# Altium PCB PCB1.PcbDoc (part 2 of 2)
Units mm, origin at the board's own origin, x right, y up, seen from the top; angles counter-clockwise.
Board outline 100.46 x 63.37 mm, 4 copper layers (Top Layer, GND, VCC, Btm lyer), stack 0.603 mm thick; 189 components, 141 nets, 719 pads, 18 vias.
Unrouted connection lines stored in the file: 486.
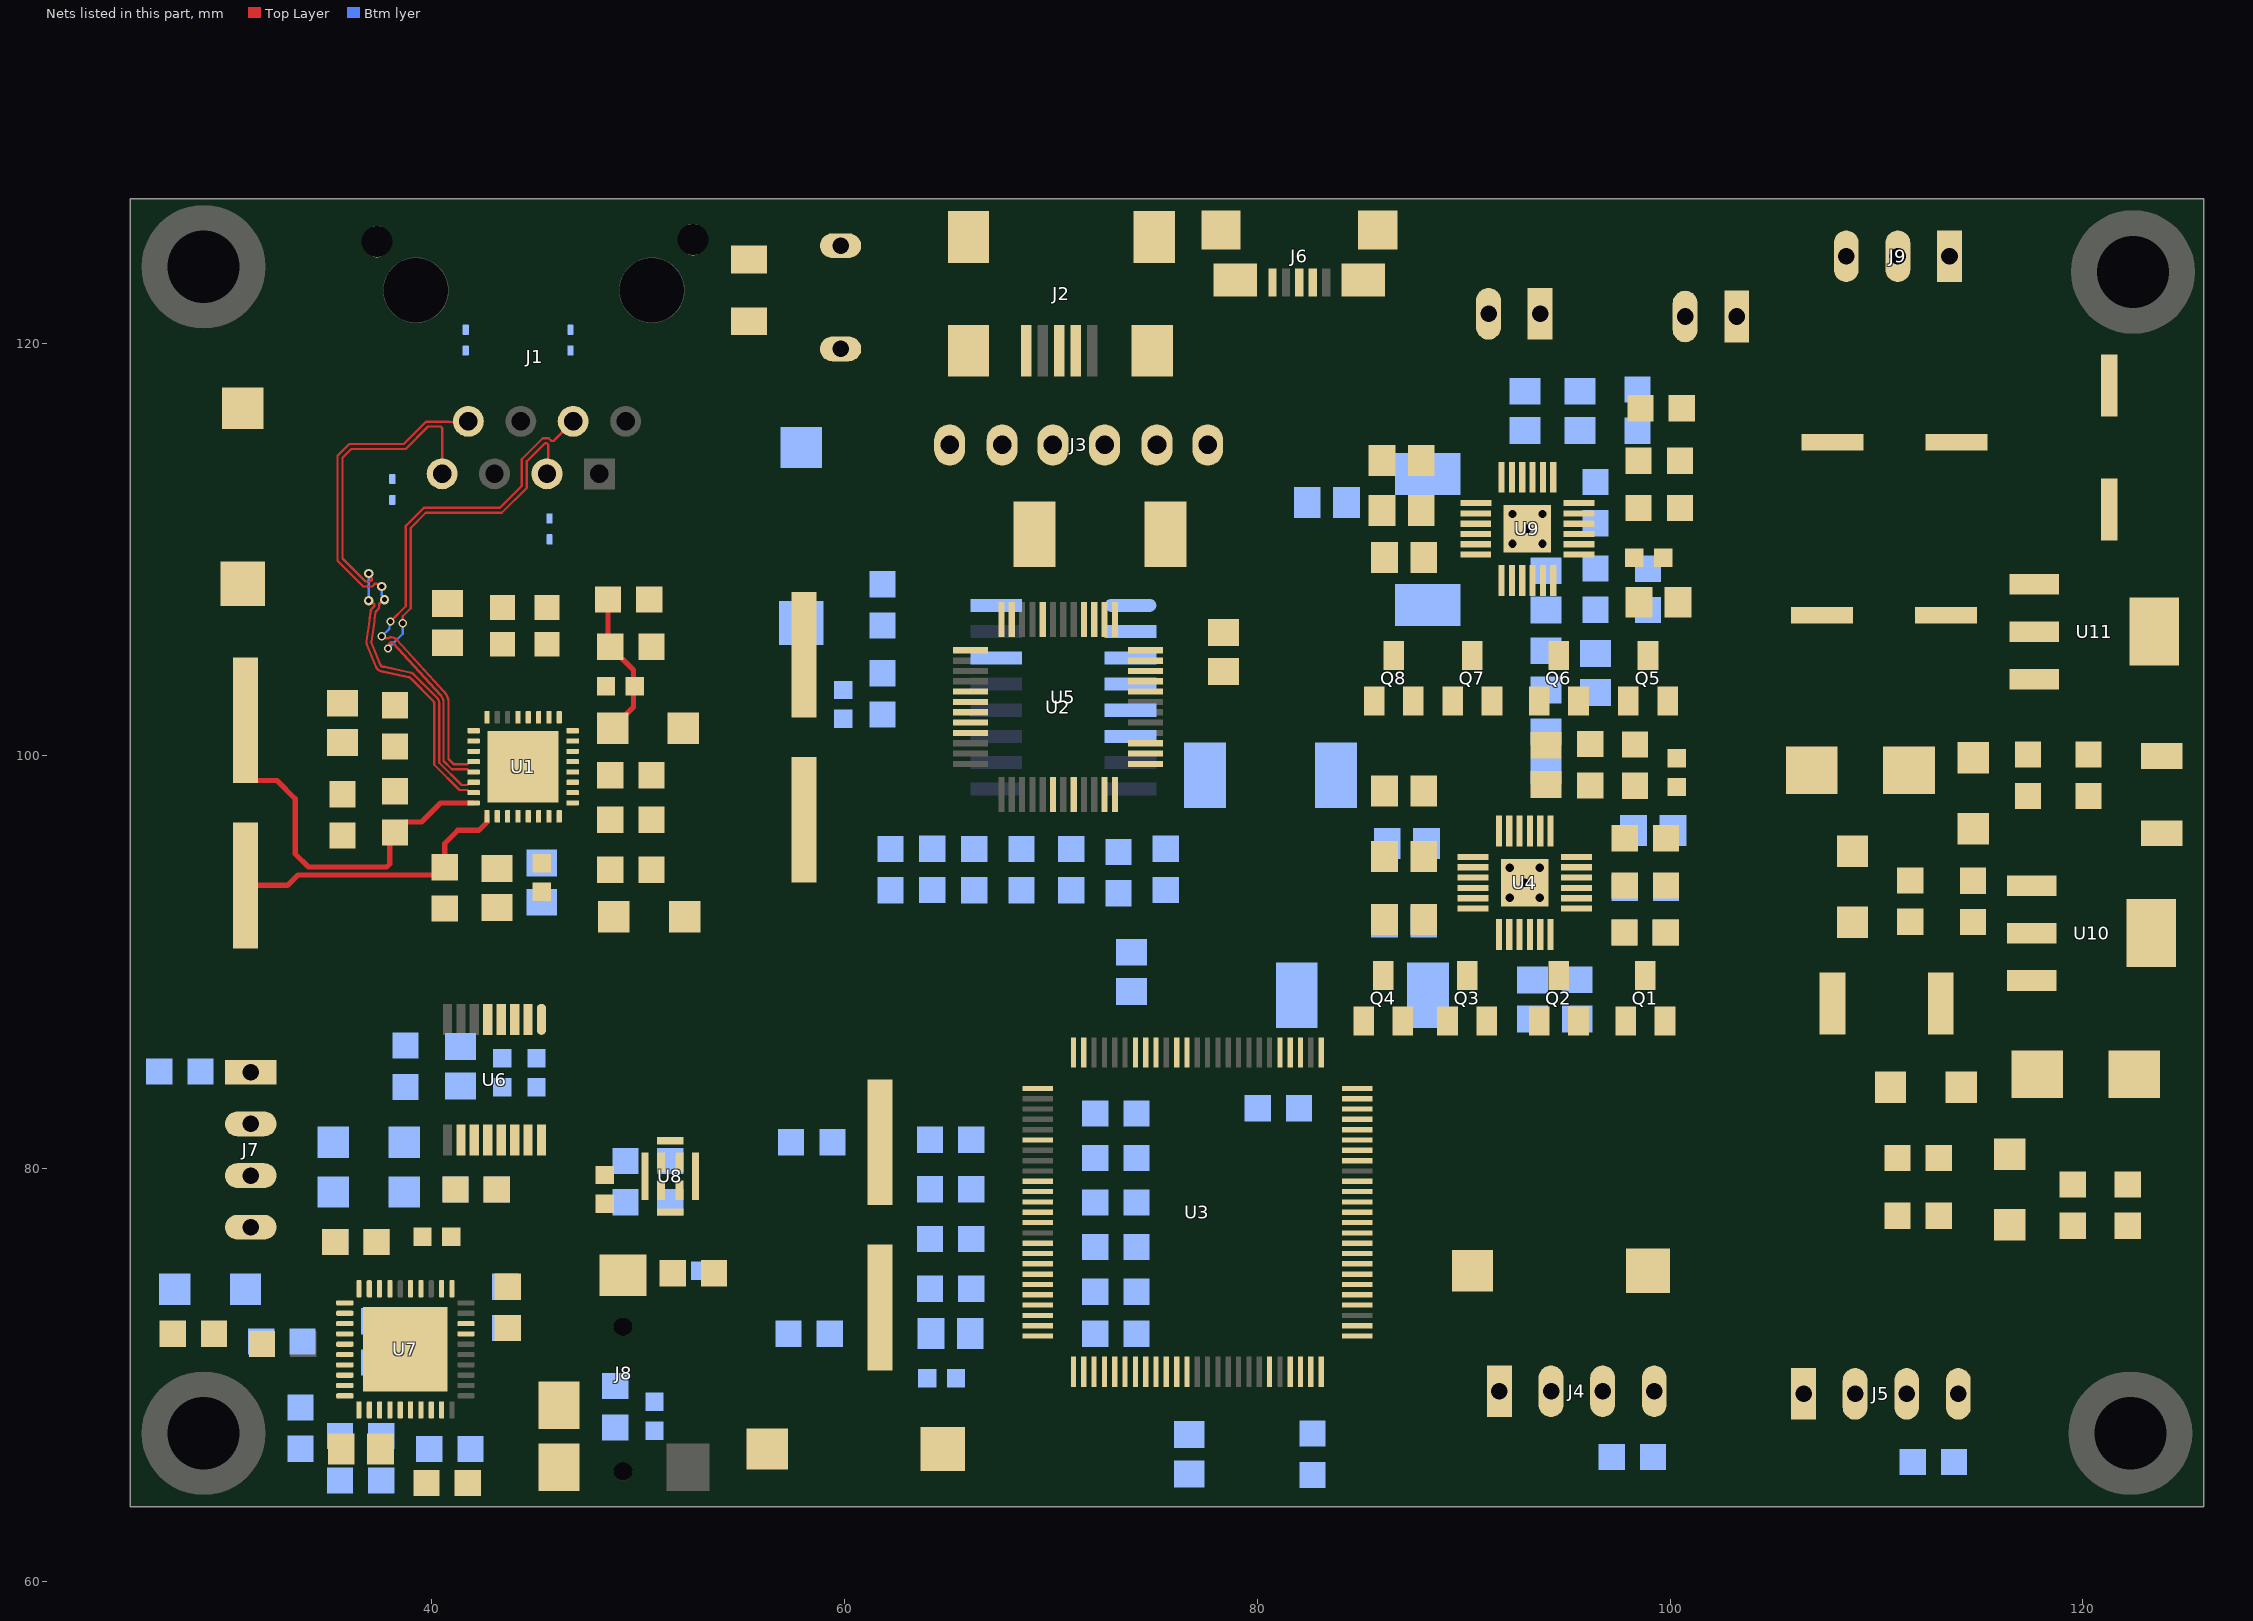
[diagram p2: the nets of this part, all layers, seen from the top]

## Part data (continued)
C13 C14 C15 C37 C39 C70 C72: library part CAP_0.1uF-50V-20%-0805, "0.1µF ±20% 50V Ceramic Capacitor X7R 0805 (2012 Metric)", Alternate Part Number-1=NA, Case/Package=0805, Manufacturer="Samsung Electro-Mechanics", Manufacturer Part Number=CL21B104MBCNNNC, Supplier Part Number-1=0805B104K500CT, Supplier-1=SIRICOM
C16 C17: library part CAP_30pF-50V-10%-0805, "±10% 50V Ceramic Capacitor C0G, NP0 0805 (2012 Metric)", Alternate Part Number=NA, Case/Package=0805, Manufacturer=KEMET, Manufacturer Part Number=C0805C300K5GAC7800, Supplier Part Number-1="399-17443-1-ND - Cut Tape (CT)", Supplier-1=Digikey
C23 C24: library part CAP_18pF-50V-5%-0805, "18pF ±5% 50V Ceramic Capacitor C0G, NP0 0805 (2012 Metric)", Alternate Part Number-1=NA, Case/Package=0805, Manufacturer=Yageo, Manufacturer Part Number=CL21C180JBANNNC, Supplier Part Number-1=NA, Supplier-1=NA
C29: library part CAP_4.7uF-50V-10%-0805, "4.7µF ±10% 50V Ceramic Capacitor X5R 0805 (2012 Metric)", Alternate Part Number-1=NA, Case/Package=0805, Manufacturer=Yageo, Manufacturer Part Number=GRM21BR61H475KE51L, Supplier Part Number-1=CL21A475KBQNNNE, Supplier-1=SIRICOM
C30 C31: library part CAP_2.2uF-25V-10%-0805, "2.2µF ±10% 25V Ceramic Capacitor X7R 0805 (2012 Metric)", Alternate Part Number-1=NA, Case/Package=0805, Manufacturer=KEMET, Manufacturer Part Number=CL21B225KAFNFNE, Supplier Part Number-1=CL21A225KAFNNNE, Supplier-1=SIRICOM
C40 C73: library part CAP_100pF-100V-5%-0805, "100pF ±5% 100V Ceramic Capacitor C0G, NP0 0805 (2012 Metric)", Alternate Part Number-1=NA, Case/Package=0805, Manufacturer=Murata, Manufacturer Part Number=CL21C101JC61PNC, Supplier Part Number-1=0805N101J101CT, Supplier-1=SIRICOM
C45 C46 C47 C52 C55 C56 C58 C60 C61 C65 C81 C84 C87 C90: library part CAP_0.1uF-50V-10%-0805, "0.1µF ±10% 50V Ceramic Capacitor X7R 0805 (2012 Metric)", Alternate Part Number-1=NA, Case/Package=0805, Manufacturer=Samsung, Manufacturer Part Number=CL21B104KBCNNNC, Supplier Part Number-1=0805B104K500CT, Supplier-1=SIRICOM
C62 C63: library part CAP_22nF-50V-10%-0805, "0.022µF ±10% 50V Ceramic Capacitor X7R 0805 (2012 Metric)", Alternate Part Number-1=NA, Case/Package=0805, Manufacturer="Samsung Electro-Mechanics", Manufacturer Part Number=CL21B223KBANNNC, Supplier Part Number-1="1276-1081-1-ND - Cut Tape (CT)", Supplier-1=Digikey
C66 C67 C68 C69: library part CAP_150pF-50V-10%-0805, "150pF ±10% 50V Ceramic Capacitor C0G, NP0 0805 (2012 Metric)", Alternate Part Number-1=NA, Case/Package=0805, Manufacturer="AVX Corporation", Manufacturer Part Number=08055A151KAT2A, Supplier Part Number-1="478-10501-1-ND - Cut Tape (CT)", Supplier-1=Digikey
C77 C78 C79: library part CAP-P_100uF-25V-20%-RAD, "100µF 25V Aluminum Electrolytic Capacitors Radial, Can - SMD 1000 Hrs @ 105°C", Alternate Part Number-1=NA, Case/Package=Radial-SMD, Manufacturer=Nichicon, Manufacturer Part Number=UWT1E101MCL1GS, Supplier Part Number-1=UWT1E101MCL1GS, Supplier-1="SP ROAD"
D1 D2 D3 D4: library part DIO-T_3.3V-8.8V-10A-SOD923, "TVS DIODE 3.3V 8.8V SOD923", Alternate Part Number-1=NA, Case/Package=SOD923, Manufacturer="Micro Commercial Co", Supplier Part Number-1=ESD3V3D9-TPMSTR-ND, Manufacturer Part Number=ESD3V3D9-TP, Supplier-1=Digikey
D5 D7: library part DIO-S_445mV-30V-2A-SMB, "Diode Schottky 30V 2A Surface Mount SMB", Alternate Part Number-1=NA, Case/Package=SMB, Manufacturer="ON Semiconductor", Manufacturer Part Number=MBRS130LT3G, Supplier Part Number-1=MBRS130LT3G, Supplier-1=ARROW
D6: library part DIO-Z_1.8V-500mW-DO213AA, "Zener Diode 1.8V 500mW ±5% Surface Mount DO-213AA"
D8: library part DIO-Z_3.3V-500mW-SOD-80, "Zener Diode 3.3V 500mW ±5% Surface Mount LLDS; MiniMelf", Alternate Part Number-1=TZM5226B-GS08, Case/Package=SOD-80, Manufacturer="Vishay Semiconductors", Manufacturer Part Number=BZV55-C3V3,135, Supplier Part Number-1=BZV55-C3V3, Supplier-1=SIRICOM
DS1 DS2: library part LED_GREEN-2.2-20mA-0805, "Green 569nm LED Indication - Discrete 2.1V 0805 (2012 Metric)", Alternate Part Number-1=NA, Case/Package=0805, Manufacturer="Vishay Lite-On", Manufacturer Part Number=LTST-C171GKT, Supplier Part Number-1=LTST-C171GKT, Supplier-1="SP ROAD"
FB1 FB2 FB3 FB4: library part FB_1K-100MHZ-1.6A-0805, "1 kOhms @ 100MHz 1 Power Line Ferrite Bead 0805 (2012 Metric) 1.6A", Alternate Part Number-1=NA, Case/Package=0805, Manufacturer=Laird, Manufacturer Part Number=BLM21SP102SH1D, Supplier Part Number-1=ACMS201209A102, Supplier-1=SIRICOM
J1: library part CON-SKT-RJ_8C8P-RA-TH, "8 Pins, 2 Row 2.54mm Pitch, right angle Connector, male", Alternate Part Number-1=NA, Case/Package=TH-CON, Manufacturer=Assmann, Manufacturer Part Number=A-2004-2-4-LPS-N-R, Supplier Part Number-1=A-2004-2-4-LPS-N-R, Supplier-1="SP ROAD"
J2: library part CON_USB2.0-MINIB-SMD, "USB - mini B USB 2.0 Receptacle Connector 5 Position Surface Mount, Right Angle", Alternate Part Number-1=NA, Case/Package=USB-MINI-B, Manufacturer=EDAC, Manufacturer Part Number=690-005-299-043, Supplier Part Number-1=C105424, Supplier-1=LCSC
J3: library part CON-BS-SKT_6X1-100-ST-TH, "6 Pins, 1 Row 2.54mm Pitch, Straight bergstrip, Female", Alternate Part Number-1=NA, Case/Package=TH-CON, Manufacturer=Molex, Manufacturer Part Number=22-10-2061, Supplier Part Number-1=NA, Supplier-1="SP ROAD"
J4 J5 J7: library part CON-PLG_4X1-100-RA-TH, "4 Pins, 1 Row 2.54mm Pitch, right angle Connector, male", Alternate Part Number-1=NA, Case/Package=TH-CON, Crimp Part Number=ASXHSXH22K51, Manufacturer="Wurth Electronics", Mating Part Number=XHP-4, Supplier Part Number-1=S4B-XH-A, Manufacturer Part Number=S4B-XH-A-1(LF)(SN), Supplier-1=LCSC
J6: library part CON_USB2.0_MICROB-SMD, "USB - micro B USB 2.0 Receptacle Connector 5 Position Surface Mount, Right Angle", Alternate Part Number-1=NA, Case/Package="USB MICRO-B SMD", Manufacturer=ICC, Manufacturer Part Number=10118192-0001LF, Supplier Part Number-1="MICRO USB", Supplier-1=SUNROM
J8: library part CON-PLG-STEREO_4X1-100-RA-SMD, "2.50mm (0.094\", 3/32\", Sub Mini, Miniature) - Headphone Phone Jack Stereo (4 Conductor, TRRS) Connector Solder", Alternate Part Number-1=NA, Case/Package=SMD, Manufacturer="CUI Devices", Manufacturer Part Number=SJ-2504A-SMT-TR, Supplier Part Number-1="CP-SJ-2504A-SMT-CT-ND - Cut Tape (CT)", Supplier-1=Digikey
J9: library part CON-TB_3X1-100-ST-TH, "3 Pins, 1 Row 2.54mm Pitch, straight Connector, male", Alternate Part Number-1=NA, Case/Package=TH-CON, Manufacturer="Phoenix Contact", Manufacturer Part Number=1725669, Supplier Part Number-1=1725669, Supplier-1="SP ROAD"
MH1 MH2 MH3 MH4: library part MH_3.5H_6D, Alternate Part Number-1=NA, Case/Package=TH, Manufacturer=NA, Manufacturer Part Number=NA, Supplier Part Number-1=NA, Supplier-1=NA
MOTOR1 MOTOR2: library part CON-PLG_2X1-100-RA-TH, "2 Pins, 1 Row 2.54mm Pitch, right angle Connector, male", Alternate Part Number-1=NA, Case/Package=TH-CON, Crimp Part Number=ASXHSXH22K51, Manufacturer=JST, Mating Part Number=XHP-2, Manufacturer Part Number=S2B-XH-A(LF)(SN), Supplier Part Number-1=S2B-XH-A(LF)(SN), Supplier-1=ARROW
Q1 Q2 Q3 Q4 Q5 Q6 Q7 Q8: library part MOSFET-N_30V-5.8A-SOT23, "N-Channel 30V 5.8A (Ta) 1.4W (Ta) Surface Mount SOT-23-3L", Alternate Part Number-1=PMV50ENEAR, Case/Package=SOT23, Manufacturer="International Rectifier", Manufacturer Part Number=AO3404A, Supplier Part Number-1=AO3404A, Supplier-1=ARROW
R1 R3 R16 R17 R18 R19 R22 R23 R24 R25 R36 R37 R38 R39 R42 R43 R44 R45: library part RES_10K-0.125W-1%-0805, "10 kOhms ±1% 0.125W, 1/8W Chip Resistor 0805 (2012 Metric) Automotive AEC-Q200 Thick Film", Alternate Part Number-1=WR08X1002FTL, Case/Package=0805, Manufacturer=CTS, Manufacturer Part Number=WR08X1002FTL, Supplier Part Number-1=WR08X1002FTL, Supplier-1=SIRICOM
R2 R4 R9 R12 R26 R27 R28 R33: library part RES_10K-0.1W-1%-0603, "10 kOhms ±1% 0.1W, 1/10W Chip Resistor 0603 (1608 Metric) Automotive AEC-Q200 Thick Film", Alternate Part Number-1=0603WAJ0103T5E, Case/Package=0603, Manufacturer=Walsin, Manufacturer Part Number=WR06X1002FTL, Supplier Part Number-1=WR06X1002FTL, Supplier-1=SIRICOM
R5: library part RES_6.49K-0.125W-1%-0805, "6.49 kOhms ±1% 0.125W, 1/8W Chip Resistor 0805 (2012 Metric) Moisture Resistant Thick Film", Alternate Part Number-1=NA, Case/Package=0805, Manufacturer="Stackpole Electronics", Manufacturer Part Number=RC0805FR-076K49L, Supplier Part Number-1=WRO8X6491FTL, Supplier-1=SIRICOM
R6: library part RES_1M-0.25W-1%-1206, "1 MOhms ±1% 0.25W, 1/4W Chip Resistor 1206 (3216 Metric) Automotive AEC-Q200, High Voltage Thick Film", Alternate Part Number-1=NA, Case/Package=1206, Manufacturer=Walsin, Manufacturer Part Number=WR12X1004FTL, Supplier Part Number-1=WR12X1004FTL, Supplier-1=SIRICOM
R7: library part RES_2.7K-0.125W-1%-0805, "2.7 kOhms ±1% 0.125W, 1/8W Chip Resistor 0805 (2012 Metric) Thick Film", Alternate Part Number-1=NA, Case/Package=0805, Manufacturer="Stackpole Electronics", Manufacturer Part Number=1623181-1, Supplier Part Number-1=WR08X2701FTL, Supplier-1=SIRICOM
R8 R10: library part RES_100mOHM-1W-5%-2512, "100 mOhms ±5% 1W Chip Resistor 2512 (6432 Metric) High Voltage, Non-Magnetic Thick Film", Alternate Part Number-1=CR2512J0R12E04, Case/Package=2512, Manufacturer="CTS Resistor Products", Manufacturer Part Number=73L7R10J, Supplier Part Number-1=NA, Supplier-1="SP ROAD"
R11 R13: library part RES_100K-0.125W-1%-0805, "100 kOhms ±1% 0.125W, 1/8W Chip Resistor 0805 (2012 Metric) Automotive AEC-Q200 Thick Film", Alternate Part Number-1=NA, Case/Package=0805, Manufacturer=Walsin, Manufacturer Part Number=WR08X1003FTL, Supplier Part Number-1=WR08X1003FTL, Supplier-1=SIRICOM
R14 R34: library part RES_2.2R-0.1W-1%-0603, "2.2 Ohms ±1% 0.1W, 1/10W Chip Resistor 0603 (1608 Metric) Automotive AEC-Q200, Current Sense Thick Film", Alternate Part Number-1=NA, Case/Package=0603, Manufacturer="Panasonic Electronic Components", Manufacturer Part Number=ERJ-3RQF2R2V, Supplier Part Number-1=NA, Supplier-1=SIRICOM
R15 R35: library part RES_3.3K-0.125W-1%-0805, "3.3 kOhms ±1% 0.125W, 1/8W Chip Resistor 0805 (2012 Metric) Thick Film", Alternate Part Number-1=0805W8F3301T5E, Case/Package=0805, Manufacturer=Panasonic, Manufacturer Part Number=1623214-1, Supplier Part Number-1=WR08X3301FTL, Supplier-1=SIRICOM
R20 R40: library part RES_50mOhm-2W-1%-2512, "50 mOhms ±1% 2W Chip Resistor 2512 (6432 Metric) Automotive AEC-Q200, Current Sense, Moisture Resistant Metal Element", Alternate Part Number-1=PMR100HZPFU5L00, Case/Package=2512, Manufacturer=Yageo, Manufacturer Part Number=PA2512FKF7W0R05E, Supplier Part Number-1=LR2512-22R060F1, Supplier-1=SIRICOM
R21 R41: library part RES_33K-0.125W-1%-0805, "Thick Film Resistors - SMD 33KOhms 1/8W 150V33 kOhms ±1% 0.125W, 1/8W Chip Resistor 0805 (2012 Metric) Thick Film", Alternate Part Number-1=NA, Case/Package=0805, Manufacturer="Vishay BCcomponents", Manufacturer Part Number=CRG0805F33K, Supplier Part Number-1=WR08X3302FTL, Supplier-1=SIRICOM
R29 R30: library part RES_51.1R-0.1W-1%-0603, "51.1 Ohms ±1% 0.1W, 1/10W Chip Resistor 0603 (1608 Metric) Thick Film", Alternate Part Number-1=NA, Case/Package=0603, Manufacturer="Vishay Dale", Manufacturer Part Number=CRCW060351R1FKEAC, Supplier Part Number-1="541-5468-1-ND - Cut Tape (CT)", Supplier-1=Digikey
SW1 SW2 SW3 SW4: library part SW1_RS-282G05A3-SMRT-SMD, "Tactile Switch SPST-NO Top Actuated Surface Mount", Alternate Part Number-1=NA, Case/Package=SMD, Manufacturer="ITT C&K", Manufacturer Part Number=RS-282G05A3-SMRT, Supplier Part Number-1=RS-282G05A3-SMRT, Supplier-1="SP ROAD"
U1: library part IC_DP83826IRHBR, "Ethernet ICs Low latency 10/100-Mbps PHY, MII interface and enhanced mode with an industrial temperature range 32-VQFN -40 to 85", Alternate Part Number-1=NA, Case/Package=32-VQFN, Manufacturer="Texas Instruments", Supplier Part Number-1=595-DP83826IRHBR, Manufacturer Part Number=DP83826IRHBR, Supplier-1=Mouser
U2: library part IC_STM32F103C8T6, "ARM® Cortex®-M3 STM32F1 Microcontroller IC 32-Bit 72MHz 64KB (64K x 8) FLASH 48-LQFP (7x7)", Alternate Part Number-1=NA, Case/Package=LQFP48, Manufacturer=STMicroelectronics, Manufacturer Part Number=STM32F103C8T6, Supplier Part Number-1=STM32F103C8T6, Supplier-1=LCSC
U3: library part IC_STM32F407VGT6, "ARM® Cortex®-M4 STM32F4 Microcontroller IC 32-Bit 168MHz 1MB (1M x 8) FLASH 100-LQFP (14x14)", Alternate Part Number-1=STM32F407VET6, Case/Package=LQFP100, Manufacturer=STMicroelectronics, Manufacturer Part Number=STM32F407VGT6, Supplier Part Number-1=STM32F407VGT6, Supplier-1=ARROW
U4 U9: library part IC_DRV8701ERGET, "Motor Driver Power MOSFET Parallel 24-VQFN (4x4)", Alternate Part Number-1=NA, Case/Package=VFQFN24, Manufacturer="Texas Instruments", Manufacturer Part Number=DRV8701ERGET, Supplier Part Number-1=DRV8701ERGET, Supplier-1=ARROW
U5: library part IC_CH340C, "USB Bridge, USB to UART USB 2.0 UART Interface", Alternate Part Number-1=NA, Case/Package=SOIC16, Manufacturer=Olimex, Supplier Part Number-1=C84681, Manufacturer Part Number=CH340C, Supplier-1=LCSC
U6: library part IC_ADS122C04IPW, "24 Bit Analog to Digital Converter 4 Input 1 Sigma-Delta 16-TSSOP", Alternate Part Number-1=NA, Case/Package=TSSOP16, Manufacturer="Texas Instruments", Manufacturer Part Number=ADS122C04IPW, Supplier Part Number-1=ADS122C04IPW, Supplier-1=MOUSER
U7: library part IC_CS43L22, "Audio D/A Converter ICs Low Power Stereo DAC w/ClassD Spkr Driver", Alternate Part Number-1=NA, Case/Package=QFN-40, Manufacturer="Cirrus Logic", Supplier Part Number-1=777-CS43L22-CNZ, Manufacturer Part Number=CS43L22-CNZ, Supplier-1=Mouser
U8: library part IC_IMP34DT05TR, "MEMS Microphones AUTO & INDUSTRIAL SENSORS", Alternate Part Number-1=NA, Case/Package=HCLGA-4, Manufacturer=STMicroelectronics, Supplier Part Number-1=511-IMP34DT05TR, Manufacturer Part Number=IMP34DT05TR, Supplier-1=Mouser
U10: library part REG_15V-1.8V-0.8A-1.4W-SOT223, "LDO Voltage Regulators 1.8V 0.8A Positive", Alternate Part Number-1=NA, Case/Package=SOT-223-3, Manufacturer=STMicroelectronics, Supplier Part Number-1=511-LD1117S18-TR, Manufacturer Part Number=LD1117S18TR, Supplier-1=Mouser
U11: library part REG_15V-3.3V-0.9A-12W-SOT223, "Linear Voltage Regulator IC 1 Output 800mA SOT-223", Alternate Part Number-1=NA, Case/Package=SOT223, Manufacturer=STMicroelectronics, Manufacturer Part Number=LD1117S33CTR, Supplier Part Number-1=LD1117S33CTR, Supplier-1="SP ROAD"
X1 X2: library part XTAL_8MHZ-ECS-80-32-5PX-SMD, "8MHz ±30ppm Crystal 32pF 60 Ohms HC-49/US", Alternate Part Number-1=NA, Case/Package=SMD/SMT, Manufacturer="Fox Electronics", Manufacturer Part Number=ECS-80-32-5PX-TR, Supplier Part Number-1=ECS-80-32-5PX-TR, Supplier-1="SP ROAD"
Y1: library part XTAL_25Mhz-FOXSDLF/250F-20, "25MHz ±30ppm Crystal 20pF 30 Ohms HC-49/US", Alternate Part Number-1=NA, Case/Package=SMD, Manufacturer=Abracon, Manufacturer Part Number=FOXSDLF/250F-20, Supplier Part Number-1=FOXSDLF/250F-20, Supplier-1=MOUSER

## Via types
v1: diameter 0.8, hole 0.4, Top Layer to Btm lyer, 10 vias
v2: diameter 0.45, hole 0.25, Top Layer to Btm lyer, 4 vias
v3: diameter 0.4, hole 0.25, Top Layer to Btm lyer, 4 vias

## Nets (pads, with @x,y where several pads share a name; then routed paths per layer and width w, separated by ;. In a path a pad name is that pad's centre, name@x,y a point inside that pad or via, vN(x,y) a via of type N, cw(c..) or ccw(c..) an arc to the next point about the centre after c; other vN are vias at no path point)
1V8: C51.2 C52.2 C80.2 C81.2 C82.2 D6.K FB4.2 U7.34 U10.2 U10.4
3.3V: C13.2 C14.2 C15.2 C18.2 C19.2 C20.2 R7.2 R9.2 R23.1 U2.1 U2.9 U2.24 U2.36 U2.48
3V3: C21.2 C22.2 C25.2 C26.2 C27.2 C28.2 C29.1 C36.2 C44.2 C45.2 C47.2 C58.2 C59.2 C60.2 C64.2 C65.2 C86.2 C87.2 C88.2 D8.K FB2.1 FB3.2 J4.3 J5.3 J7.1 R12.2 R26.2 R27.2 R28.2 R33.2 R43.1 SW4.2 U3.6 U3.11 U3.19 U3.28 U3.50 U3.75 U3.100 U5.4 U5.16 U6.13 U7.5 U7.8 U8.1 U11.2 U11.4
A0: C48.1 C50.2 J7.2 U6.11
A1: C48.2 C49.2 J7.3 U6.10
ADC_DRDY: U3.56 U6.14
ADC_RESET: SW4.1 U3.55 U6.3
CAN_RX: J5.2 U3.70
CAN_TX: J5.1 U3.71
COL1: DS1.A U1.28 U3.26
COL2: DS2.A U1.29 U3.23
DAC_LRCK: U3.90 U7.40
DAC_MCLK: U3.29 U7.37
DAC_RESET: R28.1 U3.54 U7.32
DAC_SCLK: U3.89 U7.38
DAC_SDIN: U3.80 U7.39
ERT: C12.1 J9.2 R6.1
ETH_RST: R1.1 SW1.2 U1.32 U3.64
EXT_UART_RX: J4.2 U3.69
EXT_UART_TX: J4.1 U3.68
GND: C1.1 C2.1 C3.1 C4.1 C5.1 C6.1 C7.1 C8.1 C9.1 C10.1 C11.1 C13.1 C14.1 C15.1 C16.1 C17.1 C18.1 C19.1 C20.1 C21.1 C22.1 C23.2 C24.2 C25.1 C26.1 C27.1 C28.1 C29.2 C30.2 C31.1 C32.1 C33.1 C34.1 C35.1 C36.1 C39.1 C40.1 C41.1 C42.1 C43.1 C44.1 C45.1 C46.1 C47.1 C49.1 C50.1 C51.1 C52.1 C53.1 C55.1 C56.1 C57.1 C58.1 C59.1 C60.1 C61.1 C64.1 C65.1 C66.2 C67.2 C68.2 C69.2 C72.1 C73.1 C74.1 C75.1 C76.1 C77.2 C78.2 C79.2 C80.1 C81.1 C82.1 C83.1 C84.1 C85.1 C86.1 C87.1 C88.1 C89.1 C90.1 C91.1 D1.A D2.A D3.A D4.A D6.A D8.A DS1.K DS2.K J2.5 J2.6 J3.6 J4.4 J5.4 J6.5 J6.6 J6.7 J6.8 J6.9 J7.4 J8.1 J9.3 R5.1 R8.2 R10.1 R11.1 R13.1 R15.2 R16.2 R17.2 R20.1 R21.1 R22.1 R24.1 R25.1 R29.2 R30.2 R35.2 R36.2 R37.2 R40.1 R41.1 R42.1 R44.1 R45.1 SW1.1 SW2.1 SW3.1 U1.33 U2.8 U2.23 U2.35 U2.47 U3.10 U3.20 U3.27 U3.74 U3.99 U4.5 U4.16 U4.20 U4.25 U5.1 U6.1 U6.2 U6.4 U6.5 U7.3 U7.17 U7.31 U7.35 U7.41 U8.5 U9.5 U9.16 U9.20 U9.25 U10.1 U11.1
  other v1: 92.239,93.128 93.689,93.128 92.964,93.853 92.239,94.578 93.689,94.578 92.366,110.273 93.816,110.273 93.091,110.998 92.366,111.723 93.816,111.723
INT: R2.2 U1.21
JNTRST_F103: J3.1 U2.40
JTCK_F103: J3.3 U2.37
JTCLK_F407: U2.18 U3.76
JTDI_F103: J3.2 U2.38
JTDO_F103: J3.5 U2.39
JTMS_F103: J3.4 U2.34
JTMS_F407: U2.25 U2.27 U3.72
LOUTA: C62.1 J8.3 U7.15
LOUTB: C63.1 J8.2 U7.14
MDC: U1.12 U3.16
MDIO: R4.2 U1.11 U3.25
mEN: R25.2 U3.45 U4.14
mEN_2: R45.2 U3.66 U9.14
mFAULT: R18.1 U3.62 U4.9
mFAULT_2: R38.1 U3.59 U9.9
MIC_CLK: U3.65 U8.3
MIC_DOUT: U8.4
mPH: U3.63 U4.15
mPH_2: U3.60 U9.15
mSNS: R19.1 U3.61 U4.10
mSNS_2: R39.1 U3.58 U9.10
mSO: U3.30 U4.11
mSO_2: U3.31 U9.11
NetC1_2: C1.2 U1.2
NetC2_2: C2.2 U1.8 Y1.1 | length 19
  Top Layer w0.254: Y1.1@30.988,101.726 30.988,99.278 31.461,98.805 32.513,98.805 33.401,97.917 33.401,95.25 34.036,94.615 37.824,94.615 37.973,94.764 37.973,96.028 C2.2@38.227,96.282 38.735,96.79 39.513,96.79 40.442,97.719 U1.8@42.037,97.719
NetC7_2: C7.2 C8.2 C9.2 C10.2 FB1.2 U1.3
NetC11_2: C11.2 U1.9 Y1.2 | length 13.9
  Top Layer w0.254: Y1.2@30.988,93.726 33.02,93.726 33.528,94.234 40.275,94.234 C11.2@40.64,94.599 40.64,95.758 41.275,96.393 42.291,96.393 42.685,96.787 42.685,97.067 U1.9@42.687,97.069
NetC12_2: C12.2 J1.9 J1.10 R6.2
NetC16_2: C16.2 U2.5 X1.2
NetC17_2: C17.2 U2.6 X1.1
NetC23_1: C23.1 U3.12 X2.2
NetC24_1: C24.1 U3.13 X2.1
NetC30_1: C30.1 U3.73
NetC31_2: C31.2 U3.49
NetC32_2: C32.2 C33.2 C34.2 C35.2 FB2.2 U3.21 U3.22
NetC37_1: C37.1 U4.3
NetC37_2: C37.2 U4.4
NetC38_2: C38.2 U4.2
NetC41_2: C41.2 C42.2 R14.1 U4.7
NetC43_2: C43.2 R18.2 R19.2 U4.8
NetC46_2: C46.2 FB3.1 U6.12
NetC53_2: C53.2 U7.10
NetC54_1: C54.1 U7.11
NetC54_2: C54.2 U7.12
NetC55_2: C55.2 C56.2 C57.2 FB4.1 U7.13 U7.16
NetC62_2: C62.2 R30.1
NetC63_2: C63.2 R29.1
NetC66_1: C66.1 U7.27
NetC67_1: C67.1 U7.28
NetC68_1: C68.1 U7.19
NetC69_1: C69.1 U7.18
NetC70_1: C70.1 U9.3
NetC70_2: C70.2 U9.4
NetC71_2: C71.2 U9.2
NetC74_2: C74.2 C75.2 R34.1 U9.7
NetC76_2: C76.2 R38.2 R39.2 U9.8
NetC83_2: C83.2 C84.2 C85.2 D5.K U10.3
NetC89_2: C89.2 C90.2 C91.2 D7.K U11.3
NetMOTOR1_1: MOTOR1.1 Q1.2 Q2.3 U4.23
NetMOTOR1_2: MOTOR1.2 Q3.1 R22.2 U4.19
NetMOTOR2_1: MOTOR2.1 Q5.2 Q6.3 U9.23
NetMOTOR2_2: MOTOR2.2 Q7.1 R42.2 U9.19
NetQ1_1: Q1.1 R16.1 U4.24
NetQ2_1: Q2.1 R17.1 U4.22
NetQ2_2: Q2.2 Q3.2 R20.2 U4.21
NetQ3_3: Q3.3 Q4.2 U4.18
NetQ4_1: Q4.1 R24.2 U4.17
NetQ5_1: Q5.1 R36.1 U9.24
NetQ6_1: Q6.1 R37.1 U9.22
NetQ6_2: Q6.2 Q7.2 R40.2 U9.21
NetQ7_3: Q7.3 Q8.2 U9.18
NetQ8_1: Q8.1 R44.2 U9.17
NetR3_1: R3.1 U1.1
NetR5_2: R5.2 U1.10
NetR8_1: R8.1 U2.44
NetR10_2: R10.2 U2.20
NetR11_2: R11.2 U3.37
NetR13_2: R13.2 U3.94
NetR14_2: R14.2 R15.1 U4.6
NetR21_2: R21.2 U4.12
NetR23_2: R23.2 U4.13
NetR33_1: R33.1 U8.2
NetR34_2: R34.2 R35.1 U9.6
NetR41_2: R41.2 U9.12
NetR43_2: R43.2 U9.13
NRST: R9.1 SW2.2 U2.7
NRST_F407: R12.1 SW3.2 U2.26 U3.14
RD_N: D1.K J1.6 U1.4 | length 25.8
  Top Layer w0.111: v3(37.592,105.791) 37.805,105.704 ccw(c37.847,105.806) 37.897,105.707 cw(c38.054,105.396) 38.312,105.631 40.611,103.107 cw(c40.021,102.57) 40.762,102.866 40.794,102.786 cw(c40.47,102.656) 40.819,102.664 cw(c40.581,102.657) 40.819,102.657 40.819,99.853 41.083,99.588 41.731,99.588 41.862,99.719 U1.4@42.037,99.719 ; v3(38.016,106.51) 38.751,107.245 38.751,111.141 39.624,112.014 43.307,112.014 44.373,113.08 44.373,114.365 45.394,115.386 45.683,115.386 45.817,115.251 45.909,115.251 J1.6@46.863,116.205
  Btm lyer w0.111: v3(37.592,105.791) 37.961,106.16 37.961,106.455 v3(38.016,106.51)
RD_P: D2.K J1.5 U1.5 | length 25.7
  Top Layer w0.111: v3(37.89,105.2) 37.946,105.423 cw(c38.054,105.396) 38.004,105.495 ; 38.004,105.495 cw(c38.054,105.396) 38.136,105.47 40.435,102.947 cw(c40.021,102.57) 40.54,102.779 40.573,102.697 cw(c40.47,102.656) 40.581,102.66 ccw(c40.7,102.661) 40.581,102.657 40.581,99.754 40.985,99.35 41.731,99.35 41.862,99.219 U1.5@42.037,99.219 ; v3(38.608,106.426) 38.608,106.766 38.989,107.147 38.989,111.043 39.723,111.776 43.406,111.776 44.611,112.981 44.611,114.266 45.492,115.148 45.584,115.148 45.649,115.083 45.649,113.721 J1.5@45.593,113.665
  Btm lyer w0.111: v3(37.89,105.2) 38.608,105.918 v3(38.608,106.426)
RX_CLK: U1.19 U3.24
RX_D0: U1.16 U3.33
RX_D1: U1.15 U3.34
RX_D2: U1.14 U3.35
RX_D3: U1.13 U3.36
RX_DV: U1.18 U3.32
RX_ER: U1.20 U3.47
SCL: R26.1 U3.92 U6.16 U7.2
SDA: R27.1 U3.93 U6.15 U7.1
SPKA+: U7.4
SPKA-: U7.6
SPKB+: U7.7
SPKB-: U7.9
TD_N: D3.K J1.2 U1.6 | length 27.8
  Top Layer w0.111: v2(37.592,108.204) 37.5,108.204 37.36,108.344 37.266,108.344 37.131,108.21 36.696,108.21 35.449,109.457 35.449,114.542 36.011,115.103 38.651,115.103 39.736,116.189 40.855,116.189 40.867,116.178 41.756,116.178 J1.2@41.783,116.205 ; v2(37.719,107.569) 37.513,107.414 ccw(c37.58,107.325) 37.47,107.318 cw(c37.121,107.295) 37.33,107.016 37.327,107.014 ccw(c37.394,106.925) 37.284,106.942 37.238,106.628 ccw(c37.347,106.611) 37.237,106.611 37.237,106.563 cw(c36.888,106.563) 37.233,106.513 37.087,105.522 ccw(c37.197,105.506) 37.094,105.465 37.535,104.39 ccw(c37.637,104.433) 37.63,104.322 37.672,104.32 cw(c37.651,103.971) 37.726,104.312 38.964,104.042 cw(c38.89,103.702) 39.09,103.987 39.097,103.982 ; 39.098,103.982 cw(c38.96,103.788) 39.125,103.96 cw(c38.96,103.788) 39.128,103.957 ; 39.129,103.956 40.268,102.817 cw(c40.021,102.57) 40.37,102.57 40.37,102.47 40.37,102.214 40.37,99.667 41.449,98.588 41.731,98.588 41.796,98.653 U1.6@42.164,98.653
  Btm lyer w0.111: v2(37.592,108.204) 37.592,107.788 37.719,107.661 v2(37.719,107.569)
TD_P: D4.K J1.1 U1.7 | length 28.6
  Top Layer w0.111: v2(36.952,107.519) 37.176,107.392 cw(c37.121,107.295) 37.232,107.303 ; v2(36.957,108.839) 36.957,108.747 37.097,108.607 37.097,108.513 37.032,108.448 36.795,108.448 35.687,109.556 35.687,114.443 36.109,114.865 38.749,114.865 39.835,115.951 40.448,115.951 40.513,115.886 J1.1@40.513,113.665 ; 37.232,107.303 cw(c37.121,107.295) 37.188,107.207 37.185,107.204 ccw(c37.394,106.925) 37.049,106.977 37.002,106.662 ccw(c37.347,106.611) 36.999,106.611 36.999,106.563 cw(c36.888,106.563) 36.997,106.547 36.851,105.556 ccw(c37.197,105.506) 36.873,105.375 37.315,104.299 ccw(c37.637,104.433) 37.617,104.084 37.658,104.082 cw(c37.651,103.971) 37.675,104.08 38.913,103.81 cw(c38.89,103.702) 38.954,103.792 38.96,103.788 39.025,103.723 40.051,102.697 40.1,102.648 40.132,102.57 40.132,99.568 41.35,98.35 41.731,98.35 41.824,98.257 U1.7@41.996,98.257
  Btm lyer w0.111: v2(36.952,107.519) 36.955,107.521 36.955,108.837 v2(36.957,108.839)
TX_CLK: U1.22 U3.18
TX_D1: U1.25 U3.52
TX_D2: U1.26 U3.17
TX_D3: U1.27 U3.1
TX_DO: U1.24 U3.51
TX_EN: U1.23 U3.48
uD_N: J6.2 U5.6
uD_P: J6.3 U5.5
uRST: U3.57 U5.14
uRX: U3.79 U5.3
usb_n: J2.2 U2.32
usb_p: J2.3 R7.1 U2.33
uTX: U3.78 U5.2
VCC: C38.1 C39.2 C40.2 C71.1 C72.2 C73.2 C77.1 C78.1 C79.1 D5.A D7.A J9.1 Q1.3 Q4.3 Q5.3 Q8.3 U4.1 U9.1
VDDIO: C3.2 C4.2 C5.2 C6.2 FB1.1 R1.2 R2.1 R3.2 R4.1 U1.17 | length 7.2
  Top Layer w0.254: C5.2@48.546,107.569 48.546,105.394 C6.2@48.657,105.283 49.784,104.156 49.784,102.362 C3.2@48.768,101.346
pads on no net: C61.2 J1. J1.3 J1.4 J1.7 J1.8 J2.1 J2.4 J6.1 J6.4 J8. J8.4 MH1.1 MH2.1 MH3.1 MH4.1 U1.30 U1.31 U2.2 U2.3 U2.4 U2.10 U2.11 U2.12 U2.13 U2.14 U2.15 U2.16 U2.17 U2.19 U2.21 U2.22 U2.28 U2.29 U2.30 U2.31 U2.41 U2.42 U2.43 U2.45 U2.46 U3.2 U3.3 U3.4 U3.5 U3.7 U3.8 U3.9 U3.15 U3.38 U3.39 U3.40 U3.41 U3.42 U3.43 U3.44 U3.46 U3.53 U3.67 U3.77 U3.81 U3.82 U3.83 U3.84 U3.85 U3.86 U3.87 U3.88 U3.91 U3.95 U3.96 U3.97 U3.98 U5.7 U5.8 U5.9 U5.10 U5.11 U5.12 U5.13 U5.15 U6.6 U6.7 U6.8 U6.9 U7.20 U7.21 U7.22 U7.23 U7.24 U7.25 U7.26 U7.29 U7.30 U7.33 U7.36

## Keep-outs
Keep-Out Layer:
  the board outline again, w0.127

## Silkscreen, mask and mechanical layers (free items; w line width, h text height)
Top Overlay:
  lines w0.254: 25.349,89.738 33.477,89.738 39.599,89.738 ; 39.726,89.865 53.213,89.865 54.153,88.925 54.153,64.567 53.543,63.957 ; 87.376,127 87.376,117.983 85.217,115.824 84.201,115.824 83.947,115.57 83.947,86.868 84.836,85.979 106.299,85.979 109.093,83.185 109.093,76.327 110.744,74.676 125.603,74.676

## Text inside footprints (layer, text, board x,y; h text height)
D5: Top Overlay "A" at 116.392,86.707 h0.89; Top Overlay "K" at 123.517,86.582 h0.89
D7: Top Overlay "A" at 105.47,101.439 h0.89; Top Overlay "K" at 112.595,101.314 h0.89
DS1: Top Overlay "K" at 45.343,109.024 h0.56 r270; Top Overlay "A" at 45.418,104.312 h0.51 r270
DS2: Top Overlay "K" at 43.184,109.024 h0.56 r270; Top Overlay "A" at 43.259,104.312 h0.51 r270
U5: Bottom Overlay "16" at 67.462,107.925 h0.89; Bottom Overlay "9" at 66.734,96.961 h0.89; Bottom Overlay "8" at 74.628,96.838 h0.89; Bottom Overlay "1" at 74.701,107.798 h0.89
U6: Top Overlay "8" at 40.488,88.697 h0.64 r270; Top Overlay "9" at 40.492,80.225 h0.64 r270; Top Overlay "16" at 45.085,80.391 h0.64 r270; Top Overlay "1" at 45.064,88.48 h0.64 r270